# Altium PCB ctrb0505-A.PcbDoc (part 2 of 2)
Units mm, origin at the board's own origin, x right, y up, seen from the top; angles counter-clockwise.
Board outline 92.5 x 72 mm, 4 copper layers (Top Layer, Mid-Layer 1, Mid-Layer 2, Bottom Layer); 143 components, 70 nets, 526 pads, 81 vias.
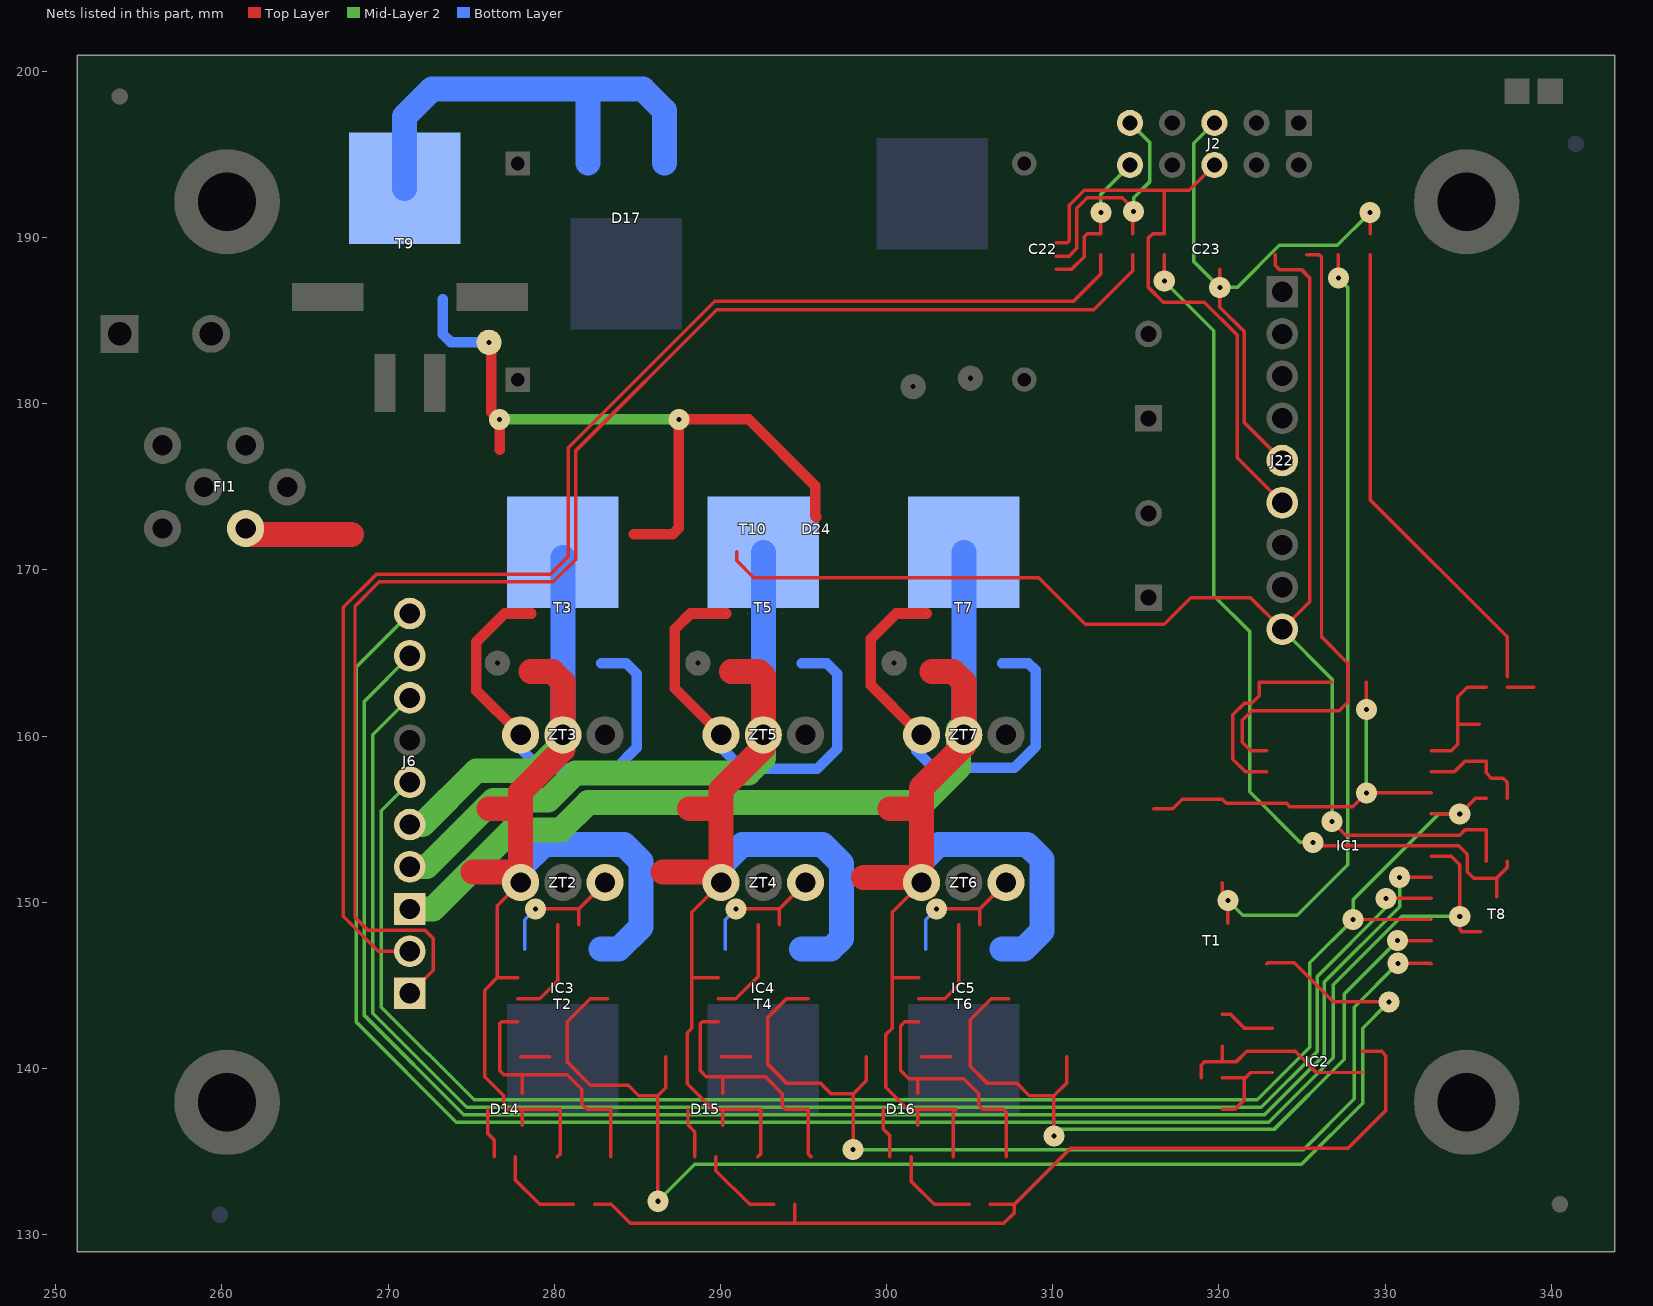
[diagram p4: the nets of this part, all layers, seen from the top]

## Via types
v1: diameter 1.27, hole 0.305, Top Layer to Bottom Layer, 81 vias

## Nets (pads, with @x,y where several pads share a name; then routed paths per layer and width w, separated by ;. In a path a pad name is that pad's centre, name@x,y a point inside that pad or via, vN(x,y) a via of type N, cw(c..) or ccw(c..) an arc to the next point about the centre after c; other vN are vias at no path point) (continued)
N7: C10.1 D8.K D11.A D14.1 D18.A D19.K IC3.6 J6.3 T2.S T3.D ZT2.S ZT3.D | length 83.4
  Top Layer w0.21: ZT2.S@277.976,151.184 276.579,149.787 276.579,145.469 ; D14.1@278.065,136.566 278.065,137.532 ; D11.A@280.186,134.674 280.364,134.852 C10.1@280.364,137.532 278.065,137.532 ; 276.579,145.469 IC3.6@277.816,145.469 276.579,145.469 ; 276.579,145.469 275.817,144.707 275.817,139.5 276.96,138.357 276.96,137.722 277.15,137.532 278.065,137.532
  Top Layer w1.5: D8.K@275.118,151.819 277.341,151.819 ZT2.S@277.976,151.184 277.976,155.629 ; D18.A@276.071,155.629 277.976,155.629 ; D19.K@278.611,163.884 279.881,163.884 280.516,163.249 ZT3.D@280.516,160.074 280.516,159.185 277.976,156.645 277.976,155.629
  Mid-Layer 2 w1.5: J6.3@271.308,154.677 272.07,154.677 275.309,157.915 278.865,157.915 280.516,159.566 ZT3.D@280.516,160.074
  Bottom Layer w1.5: ZT2.S@277.976,151.184 277.976,152.073 279.373,153.47 284.199,153.47 285.215,152.454 285.215,148.517 283.881,147.184 T2.S@282.816,147.184 ; ZT3.D@280.516,160.074 T3.D@280.516,170.742
N8: FI5.2 R8.2 T8.D | length 54.5
  Top Layer w0.21: v1(316.711,187.379) FI5.2@316.711,188.967 ; v1(325.664,153.597) 325.855,153.407 334.427,153.407 334.935,152.899 334.935,151.837 335.334,151.438 336.713,151.438 ; T8.D@336.713,150.32 336.713,151.438 ; R8.2@337.348,152.454 337.348,152.091 336.713,151.456 336.713,151.438
  Mid-Layer 2 w0.21: v1(316.711,187.379) 319.695,184.395 319.695,168.456 321.854,166.297 321.854,156.645 324.902,153.597 v1(325.664,153.597)
N9: D17.A1 D17.A2 T9.D | length 28.8
  Bottom Layer w1.5: T9.D@270.991,192.967 270.991,197.285 272.642,198.936 275.306,198.936 282.026,198.936 ; D17.A1@282.026,194.491 282.026,198.936 ; D17.A2@286.626,194.491 286.626,197.639 285.329,198.936 282.026,198.936
N10: C4.- D24.3 pad.VIA-091X03-VE@276.071,183.696 R3.2 R4.1 T9.G | length 43.9
  Top Layer w0.635: pad.VIA-091X03-VE@276.071,183.696 276.198,183.569 276.198,179.505 276.706,178.997 v1(276.706,179.061) R4.1@276.706,177.219 ; C4.-@284.783,172.139 287.12,172.139 287.501,172.52 R3.2@287.501,173.409 v1(287.501,179.061) 291.692,179.061 295.692,175.06 295.692,173.244 295.756,173.18
  Mid-Layer 2 w0.635: v1(276.706,179.061) v1(287.501,179.061)
  Bottom Layer w0.635: T9.G@273.291,186.3 273.291,184.19 273.785,183.696 pad.VIA-091X03-VE@276.071,183.696
N11: D2.K R11.1 | length 1.8
  Top Layer w0.21: R11.1@277.976,140.707 D2.K@279.733,140.707
N12: FI6.2 R7.2 R42.1 | length 30.4
  Top Layer w0.21: FI6.2@329.093,188.967 329.093,174.235 337.348,165.98 337.348,163.567 ; R42.1@337.348,162.932 R7.2@338.936,162.932
N13: C11.1 R6.1 | length 5.5
  Top Layer w0.21: C11.1@277.658,134.674 277.658,133.282 279.124,131.817 R6.1@281.151,131.817
N14: FI7.2 R2.2 T1.G | length 48.4
  Top Layer w0.21: 320.203,151.184 320.203,150.435 v1(320.534,150.105) T1.G@320.534,148.733 ; v1(327.188,187.57) FI7.2@327.188,188.967
  Mid-Layer 2 w0.21: v1(320.534,150.105) 321.423,149.216 324.712,149.216 327.76,152.264 327.76,186.998 v1(327.188,187.57)
N15: FI8.2 IC1.14 | length 38.2
  Top Layer w0.21: IC1.14@322.87,159.122 321.918,159.122 321.41,159.63 321.41,160.963 321.981,161.535 327.252,161.535 327.76,162.043 327.76,164.392 326.172,165.98 326.172,188.84 326.045,188.967 FI8.2@325.283,188.967
N16: D3.K R12.1 | length 1.8
  Top Layer w0.21: R12.1@290.041,140.707 D3.K@291.798,140.707
N17: C14.1 R9.1 | length 5.2
  Top Layer w0.21: C14.1@289.723,134.674 289.723,133.849 291.755,131.817 R9.1@293.216,131.817
N18: D4.K R13.1 | length 1.8
  Top Layer w0.21: R13.1@302.106,140.707 D4.K@303.863,140.707
N19: C17.1 R10.1 | length 5.5
  Top Layer w0.21: C17.1@301.471,134.674 301.471,133.214 302.868,131.817 R10.1@304.963,131.817
N26: IC5.7 R20.1 | length 6.3
  Top Layer w0.21: IC5.7@301.946,144.199 303.503,144.199 304.328,145.025 R20.1@304.328,148.644
N31: F1.1 FI1.CB | length 6.5
  Top Layer w1.5: FI1.CB@261.426,172.497 261.783,172.139 F1.1@267.803,172.139
N38: C16.1 D10.K D13.A D16.1 D22.A D23.K IC5.6 J6.1 T6.S T7.D ZT6.S ZT7.D | length 110.8
  Top Layer w0.21: D16.1@301.877,136.566 301.877,137.532 ; IC5.6@301.946,145.469 300.328,145.469 ; ZT6.S@302.106,151.184 300.328,149.406 300.328,145.469 ; D13.A@303.999,134.674 303.999,137.354 C16.1@304.176,137.532 301.877,137.532 ; 300.328,145.469 300.328,142.421 299.947,142.04 299.947,138.865 301.28,137.532 301.877,137.532
  Top Layer w1.5: D10.K@298.613,151.502 302.106,151.502 ZT6.S@302.106,151.184 302.106,155.629 ; D22.A@300.201,155.629 302.106,155.629 ; D23.K@302.741,163.884 304.011,163.884 304.646,163.249 ZT7.D@304.646,160.074 304.646,159.439 302.106,156.899 302.106,155.629
  Mid-Layer 2 w1.5: J6.1@271.308,149.597 272.705,149.597 277.468,154.359 280.389,154.359 282.04,156.01 302.233,156.01 304.328,158.106 ZT7.D@304.328,160.392
  Bottom Layer w1.5: ZT6.S@302.106,151.184 302.106,152.454 303.122,153.47 308.456,153.47 309.345,152.581 309.345,148.263 308.265,147.184 T6.S@306.946,147.184 ; ZT7.D@304.646,160.074 T7.D@304.646,171.06
N43: C13.1 D9.K D12.A D15.1 D20.A D21.K IC4.6 J6.2 T4.S T5.D ZT4.S ZT5.D | length 98
  Top Layer w0.21: IC4.6@289.881,145.469 288.263,145.469 288.263,145.342 ; ZT4.S@290.041,151.184 288.263,149.406 288.263,145.342 ; D15.1@290.13,136.566 290.13,137.532 ; D12.A@292.251,134.674 292.429,134.852 C13.1@292.429,137.532 290.13,137.532 ; 288.263,145.342 288.263,142.421 287.999,142.157 287.999,139.066 289.533,137.532 290.13,137.532
  Top Layer w1.5: D9.K@286.548,151.819 290.041,151.819 ZT4.S@290.041,151.184 290.041,155.629 ; D20.A@288.136,155.629 290.041,155.629 ; D21.K@290.676,163.884 292.327,163.884 292.581,163.63 ZT5.D@292.581,160.074 292.581,159.312 290.041,156.772 290.041,155.629
  Mid-Layer 2 w1.5: J6.2@271.308,152.137 272.324,152.137 276.325,156.137 279.627,156.137 281.278,157.788 291.692,157.788 292.581,158.677 ZT5.D@292.581,160.074
  Bottom Layer w1.5: ZT4.S@290.041,151.184 290.041,152.2 291.311,153.47 296.137,153.47 297.28,152.327 297.28,147.819 296.645,147.184 T4.S@294.881,147.184 ; ZT5.D@292.581,160.074 T5.D@292.581,171.06
N45: C16.2 D13.K D16.2 IC5.8 R13.2 | length 15.3
  Top Layer w0.21: D16.2@301.877,138.497 301.877,139.373 ; IC5.8@301.946,142.802 301.09,142.802 300.836,142.548 R13.2@300.836,140.707 300.836,139.881 301.344,139.373 301.877,139.373 ; D13.K@307.198,134.674 307.198,137.354 C16.2@307.021,137.532 305.789,137.532 305.535,137.786 305.535,138.484 304.646,139.373 301.877,139.373
N46: R31.2 T3.G ZT3.G | length 26.4
  Top Layer w0.635: ZT3.G@277.976,160.074 275.309,162.741 275.309,165.662 277.023,167.377 R31.2@278.611,167.377
  Bottom Layer w0.635: ZT3.G@277.976,160.074 277.976,159.249 279.182,158.042 283.691,158.042 284.961,159.312 284.961,163.757 284.326,164.392 T3.G@282.816,164.392
N47: R30.2 T7.G ZT7.G | length 26.8
  Top Layer w0.635: ZT7.G@301.788,160.392 301.725,160.392 299.058,163.059 299.058,165.853 300.582,167.377 R30.2@302.423,167.377
  Bottom Layer w0.635: ZT7.G@301.788,160.392 301.788,159.122 302.804,158.106 307.694,158.106 308.964,159.376 308.964,163.948 308.519,164.392 T7.G@306.946,164.392
N48: C17.2 D16.3 | length 3
  Top Layer w0.21: D16.3@299.795,137.532 299.795,136.35 300.201,135.944 C17.2@300.201,134.674
N49: C8.2 IC2.5 | length 3.4
  Top Layer w0.21: C8.2@320.203,143.247 320.711,143.247 321.537,142.421 IC2.5@323.219,142.421
N50: R33.2 T5.G ZT5.G | length 26.7
  Top Layer w0.635: ZT5.G@290.041,160.074 287.247,162.868 287.247,166.424 288.199,167.377 R33.2@290.358,167.377
  Bottom Layer w0.635: ZT5.G@290.041,160.074 290.041,159.312 291.311,158.042 295.819,158.042 297.026,159.249 297.026,163.757 296.391,164.392 T5.G@294.881,164.392
N51: C20.2 IC1.10 R41.2 | length 6.7
  Top Layer w0.21: IC1.10@332.776,157.852 334.173,157.852 334.808,158.487 C20.2@336.078,158.487 336.078,157.788 336.396,157.471 337.094,157.471 337.348,157.217 R41.2@337.348,156.264
N54: C18.1 IC1.11 R42.2 | length 7.9
  Top Layer w0.21: IC1.11@332.776,159.122 333.983,159.122 334.364,159.503 334.364,160.709 ; C18.1@335.663,160.709 334.364,160.709 ; R42.2@336.078,162.932 334.935,162.932 334.364,162.36 334.364,160.709
N56: C21.2 IC1.9 R38.1 | length 24.1
  Top Layer w0.21: R38.1@316.076,155.629 317.219,155.629 317.79,156.201 320.203,156.201 320.457,155.947 324.077,155.947 324.267,155.756 328.048,155.756 v1(328.874,156.582) IC1.9@332.776,156.582 ; v1(328.874,161.598) C21.2@328.874,163.249
  Mid-Layer 2 w0.21: v1(328.874,156.582) v1(328.874,161.598)
N57: C21.1 IC1.15 R39.1 | length 12.2
  Top Layer w0.21: IC1.15@322.87,157.852 321.6,157.852 320.838,158.614 320.838,161.281 321.537,161.979 321.981,161.979 322.426,162.424 R39.1@322.426,163.249 C21.1@326.773,163.249
N59: C13.2 D12.K D15.2 IC4.8 R12.2 | length 15.8
  Top Layer w0.21: IC4.8@289.881,142.802 288.898,142.802 288.771,142.675 R12.2@288.771,140.707 288.771,139.881 289.152,139.5 290.13,139.5 ; D15.2@290.13,138.497 290.13,139.5 ; D12.K@295.451,134.674 295.273,134.852 C13.2@295.273,137.532 293.914,137.532 293.724,137.722 293.724,138.484 292.708,139.5 290.13,139.5
N63: R20.2 T6.G ZT6.G | length 8.5
  Top Layer w0.21: v1(302.995,149.597) 305.598,149.597 ; R20.2@305.598,148.644 305.598,149.597 ; ZT6.G@307.186,151.184 305.598,149.597
  Bottom Layer w0.21: T6.G@302.346,147.184 302.346,148.947 v1(302.995,149.597)
N64: C14.2 D15.3 | length 3
  Top Layer w0.21: D15.3@288.047,137.532 288.047,136.604 288.453,136.198 C14.2@288.453,134.674
N65: R32.2 T4.G ZT4.G | length 8.5
  Top Layer w0.21: v1(290.93,149.597) 293.533,149.597 ; R32.2@293.533,148.644 293.533,149.597 ; ZT4.G@295.121,151.184 293.533,149.597
  Bottom Layer w0.21: T4.G@290.281,147.184 290.281,148.947 v1(290.93,149.597)
N66: IC4.7 R32.1 | length 6
  Top Layer w0.21: IC4.7@289.881,144.199 290.93,144.199 292.263,145.533 R32.1@292.263,148.644
N68: C10.2 D11.K D14.2 IC3.8 R11.2 | length 16.1
  Top Layer w0.21: IC3.8@277.816,142.802 276.833,142.802 276.706,142.675 R11.2@276.706,140.707 276.706,139.881 276.96,139.627 278.103,139.627 280.77,139.627 281.659,138.738 281.659,137.849 281.976,137.532 C10.2@283.208,137.532 283.386,137.532 D11.K@283.386,134.674 ; D14.2@278.065,138.497 278.065,139.627
N69: C11.2 D14.3 | length 3
  Top Layer w0.21: D14.3@275.982,137.532 275.982,136.096 276.388,135.69 C11.2@276.388,134.674
N70: R35.2 T2.G ZT2.G | length 8.5
  Top Layer w0.21: v1(278.865,149.597) 281.468,149.597 ; R35.2@281.468,148.644 281.468,149.597 ; ZT2.G@283.056,151.184 281.468,149.597
  Bottom Layer w0.21: T2.G@278.216,147.184 278.216,148.947 v1(278.865,149.597)
N71: IC3.7 R35.1 | length 6.2
  Top Layer w0.21: IC3.7@277.816,144.199 279.119,144.199 280.198,145.279 R35.1@280.198,148.644
N76: C7.2 IC2.2 IC2.6 R37.1 | length 12.3
  Top Layer w0.21: R37.1@318.933,139.437 318.933,140.199 319.124,140.389 320.203,140.389 ; C7.2@320.203,141.342 320.203,140.389 ; IC2.2@328.618,139.754 325.855,139.754 324.585,141.024 IC2.6@323.219,141.024 321.664,141.024 321.029,140.389 320.203,140.389
N78: IC2.7 R37.2 R50.1 | length 6.1
  Top Layer w0.21: R50.1@320.203,137.532 320.965,137.532 321.537,138.103 321.537,139.373 321.6,139.437 ; R37.2@320.203,139.437 321.6,139.437 ; IC2.7@323.219,139.754 321.918,139.754 321.6,139.437
OE: FI9.2 IC1.7 J22.9 R5.2 R8.1 T10.G | length 85.7
  Top Layer w0.21: 290.981,171.098 290.981,170.564 292.009,169.536 309.154,169.536 311.948,166.742 316.711,166.742 318.298,168.329 321.901,168.329 J22.9@323.806,166.424 325.474,168.092 325.474,187.57 324.966,188.078 323.632,188.078 323.378,188.332 FI9.2@323.378,188.967 ; v1(326.807,154.867) 327.633,154.042 IC1.7@332.776,154.042 334.491,154.042 334.808,154.359 R5.2@336.078,154.359 R8.1@336.078,152.454
  Mid-Layer 2 w0.21: J22.9@323.806,166.424 326.807,163.423 v1(326.807,154.867)
OSC: IC2.3 R6.2 R9.2 R10.2 | length 60.3
  Top Layer w0.21: R6.2@282.421,131.817 283.437,131.817 284.58,130.674 296.137,130.674 ; R9.2@294.486,131.817 294.486,130.674 296.137,130.674 ; R10.2@306.233,131.817 307.694,131.817 ; IC2.3@328.618,141.024 329.792,141.024 330.046,140.77 330.046,137.468 327.76,135.182 311.059,135.182 307.694,131.817 ; 296.137,130.674 307.059,130.674 307.694,131.309 307.694,131.817
SENSOR1: IC1.4 J6.6 | length 94.1
  Top Layer w0.21: v1(330.046,150.232) IC1.4@332.776,150.232
  Mid-Layer 2 w0.21: J6.6@271.308,162.297 269.086,160.074 269.086,143.31 274.737,137.659 322.553,137.659 325.904,141.01 325.904,145.518 330.046,149.66 v1(330.046,150.232)
SENSOR2: IC1.5 J6.7 | length 99
  Top Layer w0.21: v1(330.871,151.502) IC1.5@332.776,151.502
  Mid-Layer 2 w0.21: J6.7@271.308,164.837 268.578,162.106 268.578,143.183 274.547,137.214 322.743,137.214 326.324,140.795 326.324,145.176 330.871,149.724 v1(330.871,151.502)
SENSOR3: IC1.6 J6.8 T8.G | length 109.7
  Top Layer w0.21: IC1.6@332.776,152.772 333.983,152.772 334.491,152.264 v1(334.491,149.152) 334.491,148.365 334.618,148.238 T8.G@335.748,148.238
  Mid-Layer 2 w0.21: J6.8@271.308,167.377 268.07,164.138 268.07,142.802 274.102,136.77 322.997,136.77 326.871,140.643 326.871,145.025 330.998,149.152 v1(334.491,149.152)
SPEED-MEASURE: C22.3 FI5.1 J2.6 J22.6 | length 37.1
  Top Layer w0.21: C22.3@310.209,189.684 310.869,189.684 310.996,189.811 310.996,191.951 311.885,192.84 316.711,192.84 ; J2.6@319.726,194.364 318.202,192.84 316.711,192.84 ; J22.6@323.806,174.044 321.092,176.758 321.092,184.14 319.124,186.109 316.647,186.109 315.758,186.998 315.758,189.983 316.012,190.237 FI5.1@316.711,190.237 316.711,192.84
SPEED-SETPOINT: C23.5 FI6.1 J2.5 J22.5 | length 36.3
  Top Layer w0.21: C23.5@320.051,188.084 v1(320.051,186.998) 320.051,185.817 321.537,184.331 321.537,178.853 J22.5@323.806,176.584 ; FI6.1@329.093,190.237 v1(329.093,191.507)
  Mid-Layer 2 w0.21: J2.5@319.726,196.904 318.489,195.667 318.489,188.56 v1(320.051,186.998) 321.092,186.998 323.632,189.538 327.125,189.538 v1(329.093,191.507)
TEMP+: FI3.2 J3.2 | length 82.4
  Top Layer w0.21: J3.2@271.308,147.057 269.403,147.057 267.308,149.152 267.308,167.758 269.276,169.726 279.754,169.726 280.833,170.806 280.833,177.346 289.66,186.173 311.25,186.173 312.901,187.824 FI3.2@312.901,188.967
TEMP-: FI4.2 J3.1 | length 87.8
  Top Layer w0.21: J3.1@271.308,144.517 272.705,145.914 272.705,147.819 272.197,148.327 268.768,148.327 268.006,149.089 268.006,167.821 269.467,169.282 279.944,169.282 281.278,170.615 281.278,177.156 289.787,185.665 312.456,185.665 314.806,188.014 FI4.2@314.806,188.967
TEMPMEASURE+: C22.1 FI3.1 J2.10 | length 9.1
  Top Layer w0.21: C22.1@310.209,188.084 311.129,188.084 311.885,188.84 311.885,190.046 312.075,190.237 FI3.1@312.901,190.237 v1(312.901,191.507)
  Mid-Layer 2 w0.21: v1(312.901,191.507) 312.901,192.619 J2.10@314.646,194.364
TEMPMEASURE-: C22.2 FI4.1 J2.9 | length 15.8
  Top Layer w0.21: C22.2@310.209,188.884 310.977,188.884 311.44,189.348 311.44,191.761 312.075,192.396 314.171,192.396 314.806,191.761 314.806,191.38 v1@314.806,191.507 ; FI4.1@314.806,190.237 v1@314.806,191.507 ; v1(314.869,191.57) v1@314.806,191.507
  Mid-Layer 2 w0.21: J2.9@314.646,196.904 315.822,195.728 315.822,193.348 314.869,192.396 v1(314.869,191.57)
TOP-DR-A: IC1.2 IC5.2 R60.1 | length 46.4
  Top Layer w0.21: IC5.2@307.346,144.199 306.297,144.199 305.027,142.929 305.027,140.135 306.043,139.119 307.821,139.119 308.583,138.357 310.069,138.357 ; v1(310.069,135.944) 310.069,138.357 ; R60.1@310.831,140.707 310.831,139.119 310.069,138.357 ; v1(330.744,147.692) IC1.2@332.776,147.692
  Mid-Layer 2 w0.21: v1(310.069,135.944) 310.45,136.325 323.315,136.325 327.531,140.541 327.531,144.478 v1(330.744,147.692)
TOP-DR-B: IC1.1 IC4.2 R59.1 | length 60.2
  Top Layer w0.21: IC4.2@295.281,144.199 293.978,144.199 292.835,143.056 292.835,140.262 293.978,139.119 296.01,139.119 296.668,138.461 297.981,138.461 ; v1(297.981,135.119) 297.981,138.461 ; R59.1@298.766,140.707 298.766,139.246 297.981,138.461 ; v1(330.776,146.326) 332.745,146.326 IC1.1@332.776,146.295
  Mid-Layer 2 w0.21: v1(297.981,135.119) 325.093,135.119 328.141,138.167 328.141,143.691 v1(330.776,146.326)
TOP-DR-C: IC1.24 IC3.2 R58.1 | length 80.6
  Top Layer w0.21: IC3.2@283.216,144.199 282.167,144.199 280.77,142.802 280.77,140.389 282.167,138.992 284.453,138.992 285.088,138.357 286.231,138.357 ; v1(286.231,132.007) 286.231,138.357 ; R58.1@286.701,140.707 286.701,138.827 286.231,138.357 ; IC1.24@322.87,146.295 322.934,146.358 324.521,146.358 326.871,144.009 v1(330.236,144.009)
  Mid-Layer 2 w0.21: v1(286.231,132.007) 288.453,134.23 324.966,134.23 328.649,137.913 328.649,142.421 v1(330.236,144.009)
V-REF-M: IC1.3 IC1.8 J6.4 R41.1 | length 100.7
  Top Layer w0.21: v1(328.077,148.962) IC1.3@332.776,148.962 ; IC1.8@332.776,155.312 v1(334.491,155.312) 335.443,156.264 R41.1@336.078,156.264
  Mid-Layer 2 w0.21: J6.4@271.308,157.217 269.594,155.502 269.594,143.691 275.182,138.103 322.299,138.103 325.474,141.278 325.474,146.358 v1(328.077,148.962) 328.077,150.168 333.221,155.312 v1(334.491,155.312)
pads on no net: C22.4 D24.2 IC3.4 IC3.5 IC4.4 IC4.5 IC5.4 IC5.5 J1.3 J1.4 J2.7 J2.8 J22.7 J22.8 MIR1.1 MIR2.1 MIR3.1 MIR4.1 PT1.2
copper on no net: | length 84
  Top Layer w0.1: 314.806,130.059 317.806,130.059 ; 314.806,130.059 314.806,133.059 ; 314.806,130.059 311.806,130.059 311.806,133.059 314.806,133.059 ; 314.806,130.059 314.806,133.059 ; 314.806,133.059 317.806,133.059 ; 317.806,130.059 317.806,133.059 ; 317.806,130.059 320.806,130.059 ; 317.806,130.059 317.806,133.059 ; 317.806,133.059 320.806,133.059 ; 320.806,130.059 320.806,133.059 ; 320.806,130.059 323.806,130.059 323.806,133.059 320.806,133.059 ; 320.806,130.059 320.806,133.059
  Mid-Layer 1 w0.1: 314.806,130.059 317.806,130.059 317.806,133.059 314.806,133.059 314.806,130.059
  Mid-Layer 2 w0.1: 317.806,130.059 320.806,130.059 320.806,133.059 317.806,133.059 317.806,130.059
  Bottom Layer w0.1: 320.806,130.059 323.806,130.059 323.806,133.059 320.806,133.059 320.806,130.059

## Polygon pours and split planes (outlines as drawn)
GND on Top Layer "Top Layer-GND" (solid, pour order 1): 252.411,129.959 cw(c252.411,130.064) 252.306,130.064 252.306,182.766 cw(c252.411,182.766) 252.485,182.841 ccw(c252.703,183.061) 252.703,182.751 254.989,182.751 ccw(c254.989,183.061) 255.299,183.061 255.299,185.347 ccw(c254.989,185.347) 254.989,185.657 252.703,185.657 ccw(c252.703,185.347) 252.485,185.567 cw(c252.411,185.642) 252.306,185.642 252.306,197.481 cw(c252.411,197.481) 252.497,197.542 ccw(c253.846,198.492) 254.886,199.773 cw(c254.952,199.854) 254.952,199.959 336.87,199.959 cw(c336.87,199.854) 336.947,199.782 ccw(c337.174,199.571) 336.864,199.571 336.864,198.047 ccw(c337.174,198.047) 337.174,197.737 338.698,197.737 ccw(c338.698,198.047) 338.876,197.793 cw(c338.936,197.707) 338.996,197.793 ccw(c339.174,198.047) 339.174,197.737 340.698,197.737 ccw(c340.698,198.047) 341.008,198.047 341.008,199.571 ccw(c340.698,199.571) 340.925,199.782 cw(c341.002,199.854) 341.002,199.959 342.701,199.959 cw(c342.701,199.854) 342.806,199.854 342.806,130.064 cw(c342.701,130.064) 342.701,129.959 340.618,129.959 cw(c340.618,130.064) 340.523,130.017 cw(c340.429,130.064) 340.429,129.959 329.513,129.959 cw(c329.513,130.064) 329.433,130.132 ccw(c328.95,130.544) 329.515,130.835 cw(c329.608,130.884) 329.522,130.944 ccw(c329.032,131.294) 329.488,131.688 cw(c329.567,131.757) 329.467,131.789 ccw(c328.912,131.966) 329.322,132.381 cw(c329.396,132.455) 329.361,132.554 ccw(c329.169,133.105) 329.08,133.681 cw(c329.064,133.785) 329.079,133.681 328.377,133.582 cw(c328.362,133.686) 328.258,133.702 ccw(c327.487,133.815) 328.259,133.921 ccw(c327.952,133.879) 328.25,133.967 ccw(c327.73,133.813) 327.735,134.355 ccw(c327.732,134.045) 327.689,134.352 326.144,134.135 ccw(c326.188,133.828) 326.144,134.135 ccw(c326.361,132.592) 324.813,132.767 cw(c324.709,132.779) 324.724,132.675 324.58,132.655 ccw(c324.624,132.348) 324.36,132.512 cw(c324.271,132.567) 324.166,132.567 324.166,133.059 ccw(c323.806,133.059) 323.806,133.419 311.806,133.419 ccw(c311.806,133.059) 311.446,133.059 311.446,130.064 cw(c311.341,130.064) 311.341,129.959
GND on Top Layer "Top Layer-GND 1" (solid, pour order 0): 314.806,161.959 317.306,161.959 317.306,156.959 314.806,156.959
GND on Mid-Layer 1 "Mid-Layer 1-GND" (solid, pour order 2): 252.411,129.959 cw(c252.411,130.064) 252.306,130.064 252.306,199.854 cw(c252.411,199.854) 252.411,199.959 342.701,199.959 cw(c342.701,199.854) 342.806,199.854 342.806,130.064 cw(c342.701,130.064) 342.701,129.959 323.911,129.959 cw(c323.911,130.064) 323.806,130.064 323.806,133.259 318.157,133.259 cw(c318.157,133.364) 318.078,133.295 ccw(c317.806,133.059) 317.806,133.419 314.806,133.419 ccw(c314.806,133.059) 314.534,133.295 cw(c314.455,133.364) 314.455,133.259 311.806,133.259 311.806,130.064 cw(c311.701,130.064) 311.701,129.959
GND-PUIS on Mid-Layer 2 "Mid-Layer 2-GND-PUIS" (solid, pour order 3): 252.411,129.959 cw(c252.411,130.064) 252.306,130.064 252.306,183.597 cw(c252.411,183.597) 252.508,183.638 ccw(c253.846,184.204) 252.759,183.239 cw(c252.681,183.17) 252.786,183.17 252.786,180.077 ccw(c253.846,180.076) 253.096,179.327 254.972,177.451 cw(c254.898,177.377) 255.003,177.385 ccw(c256.426,177.497) 256.537,178.92 cw(c256.546,179.024) 256.471,178.95 254.937,180.485 cw(c255.011,180.559) 254.906,180.559 254.906,183.17 cw(c255.011,183.17) 254.933,183.239 ccw(c253.846,184.204) 252.508,184.77 cw(c252.411,184.811) 252.306,184.811 252.306,199.854 cw(c252.411,199.854) 252.411,199.959 342.701,199.959 cw(c342.701,199.854) 342.806,199.854 342.806,130.064 cw(c342.701,130.064) 342.701,129.959 323.911,129.959 cw(c323.911,130.064) 323.806,130.064 323.806,133.259 321.157,133.259 cw(c321.157,133.364) 321.078,133.295 ccw(c320.806,133.059) 320.806,133.419 317.806,133.419 ccw(c317.806,133.059) 317.534,133.295 cw(c317.455,133.364) 317.455,133.259 311.806,133.259 311.806,130.064 cw(c311.701,130.064) 311.701,129.959
GND on Bottom Layer "Bottom Layer-GND" (solid, pour order 10): 294.306,182.459 294.306,199.959 321.806,199.959 321.806,197.9 ccw(c322.266,196.904) 321.806,195.908 321.806,195.36 ccw(c322.266,194.364) 321.806,193.368 321.806,190.925 ccw(c321.283,190.363) 321.079,189.624 ccw(c321.283,188.884) 321.806,188.323 321.806,182.459 308.595,182.459 ccw(c308.286,181.459) 307.977,182.459 306.101,182.459 306.101,184.247 ccw(c305.828,184.395) 306.138,184.395 306.138,187.57 ccw(c305.828,187.57) 305.828,187.88 304.254,187.88 ccw(c304.254,187.57) 303.944,187.57 303.944,184.395 ccw(c304.254,184.395) 303.981,184.247 303.981,182.459 301.667,182.459 301.501,182.625 301.501,184.247 ccw(c301.228,184.395) 301.538,184.395 301.538,187.57 ccw(c301.228,187.57) 301.228,187.88 299.654,187.88 ccw(c299.654,187.57) 299.344,187.57 299.344,184.395 ccw(c299.654,184.395) 299.381,184.247 299.381,182.459
+24V on Bottom Layer "Bottom Layer-+24V" (solid, pour order 9): 264.306,129.959 264.306,141.959 252.306,141.959 252.306,154.959 270.078,154.959 ccw(c271.308,154.677) 272.539,154.959 311.279,154.959 ccw(c311.504,155.693) 311.729,154.959 318.189,154.959 ccw(c318.87,155.312) 319.551,154.959 321.806,154.959 321.806,133.531 311.306,133.531 311.306,129.959
+24V on Bottom Layer "Bottom Layer-+24V 1" (solid, pour order 8): 276.306,182.459 276.306,182.966 ccw(c276.071,183.696) 276.306,184.426 276.306,197.876 280.966,197.876 280.966,196.226 ccw(c281.239,196.079) 280.929,196.079 280.929,192.904 ccw(c281.239,192.904) 281.239,192.593 282.813,192.593 ccw(c282.813,192.904) 283.123,192.904 283.123,196.079 ccw(c282.813,196.079) 283.086,196.226 283.086,197.876 284.89,197.876 285.566,197.2 285.566,196.226 ccw(c285.839,196.079) 285.529,196.079 285.529,192.904 ccw(c285.839,192.904) 285.839,192.593 287.413,192.593 ccw(c287.413,192.904) 287.723,192.904 287.723,196.079 ccw(c287.413,196.079) 287.686,196.226 287.686,197.639 ccw(c286.626,197.639) 287.376,198.389 286.079,199.686 ccw(c285.329,198.936) 285.607,199.959 293.806,199.959 293.806,182.459
N9 on Bottom Layer "Bottom Layer-N9" (solid, pour order 7): 252.306,182.459 252.306,199.959 275.306,199.959 275.306,184.324 274.045,184.324 273.967,184.402 274.078,184.402 ccw(c274.078,184.712) 274.388,184.712 274.388,187.887 ccw(c274.078,187.887) 274.078,188.197 272.504,188.197 ccw(c272.504,187.887) 272.194,187.887 272.194,184.712 ccw(c272.504,184.712) 272.504,184.402 272.663,184.402 272.663,184.19 ccw(c273.291,184.19) 272.847,183.746 273.341,183.252 ccw(c273.785,183.696) 273.785,183.068 275.306,183.068 275.306,182.459 268.848,182.459 ccw(c268.451,183.442) 269.063,182.576 ccw(c268.691,183.569) 269.751,183.569 269.751,184.564 ccw(c269.478,184.712) 269.788,184.712 269.788,187.887 ccw(c269.478,187.887) 269.478,188.197 267.904,188.197 ccw(c267.904,187.887) 267.594,187.887 267.594,184.712 ccw(c267.904,184.712) 267.631,184.564 267.631,184.114 ccw(c268.451,183.442) 268.054,182.459
N7 on Bottom Layer "Bottom Layer-N7" (solid, pour order 6): 264.306,170.459 264.306,173.62 ccw(c263.926,174.996) 264.306,176.373 264.306,181.459 276.746,181.459 ccw(c277.806,181.459) 276.759,181.291 276.759,180.722 ccw(c277.069,180.722) 277.069,180.412 277.638,180.412 ccw(c277.806,181.459) 277.974,180.412 278.543,180.412 ccw(c278.543,180.722) 278.853,180.722 278.853,180.964 cw(c279.478,180.709) 279.47,181.384 285.306,181.448 285.306,164.299 284.77,164.836 ccw(c284.326,164.392) 284.326,165.02 283.913,165.02 283.913,165.98 ccw(c283.603,165.98) 283.603,166.29 282.029,166.29 ccw(c282.029,165.98) 281.719,165.98 281.719,162.805 ccw(c282.029,162.805) 282.029,162.494 283.603,162.494 ccw(c283.603,162.805) 283.913,162.805 283.913,163.764 284.066,163.764 284.333,163.497 284.333,160.711 ccw(c283.056,160.074) 282.8,158.67 279.442,158.67 279.016,159.096 ccw(c277.976,160.074) 277.654,158.683 278.739,157.598 ccw(c279.182,158.042) 279.182,157.414 283.691,157.414 ccw(c283.691,158.042) 284.135,157.598 285.306,158.77 285.306,155.959 271.421,155.959 ccw(c271.308,157.217) 271.196,155.959 252.306,155.959 252.306,170.459
N43 on Bottom Layer "Bottom Layer-N43" (solid, pour order 5): 285.906,155.959 cw(c285.906,156.059) 285.806,156.059 285.806,181.359 cw(c285.906,181.359) 285.906,181.459 299.698,181.459 cw(c299.698,181.359) 299.769,181.43 300.277,180.922 cw(c300.206,180.851) 300.306,180.851 300.306,165.474 cw(c300.206,165.474) 300.228,165.376 ccw(c300.455,164.392) 300.228,163.408 cw(c300.206,163.31) 300.306,163.31 300.306,156.059 cw(c300.206,156.059) 300.206,155.959
N38 on Bottom Layer "Bottom Layer-N38" (solid, pour order 4): 300.906,155.959 cw(c300.906,156.059) 300.806,156.059 300.806,159.212 cw(c300.906,159.212) 300.987,159.27 ccw(c302.106,160.074) 301.195,159.04 cw(c301.129,158.965) 301.227,158.988 ccw(c301.789,159.122) 301.38,158.713 cw(c301.309,158.642) 301.381,158.712 302.396,157.697 ccw(c302.804,158.106) 302.804,157.528 307.694,157.528 ccw(c307.694,158.106) 308.102,157.697 309.372,158.966 cw(c309.443,158.896) 309.372,158.967 ccw(c308.964,159.376) 309.542,159.376 309.542,163.948 ccw(c308.964,163.948) 309.372,164.356 cw(c309.443,164.427) 309.372,164.357 308.928,164.8 ccw(c308.52,164.392) 308.519,164.97 308.093,164.97 cw(c308.093,165.07) 307.993,165.07 307.993,165.98 ccw(c307.733,165.98) 307.733,166.24 306.159,166.24 ccw(c306.159,165.98) 305.899,165.98 305.899,162.805 ccw(c306.159,162.805) 306.159,162.544 307.733,162.544 ccw(c307.733,162.805) 307.993,162.805 307.993,163.714 cw(c308.093,163.714) 308.093,163.814 308.239,163.814 cw(c308.239,163.714) 308.31,163.785 308.357,163.738 cw(c308.286,163.667) 308.386,163.667 308.386,161.06 cw(c308.286,161.06) 308.212,160.993 ccw(c307.186,160.074) 306.516,158.87 cw(c306.467,158.783) 306.467,158.683 303.085,158.683 cw(c303.085,158.783) 303.014,158.712 302.913,158.814 cw(c302.983,158.885) 302.924,158.965 ccw(c302.106,160.074) 300.987,160.878 cw(c300.906,160.936) 300.806,160.936 300.806,163.282 cw(c300.906,163.282) 300.906,163.382 301.199,163.382 cw(c301.199,163.282) 301.299,163.282 301.299,162.805 ccw(c301.559,162.805) 301.559,162.544 303.133,162.544 ccw(c303.133,162.805) 303.393,162.805 303.393,165.98 ccw(c303.133,165.98) 303.133,166.24 301.559,166.24 ccw(c301.559,165.98) 301.299,165.98 301.299,165.502 cw(c301.199,165.502) 301.199,165.402 300.906,165.402 cw(c300.906,165.502) 300.806,165.502 300.806,180.161 cw(c300.906,180.161) 300.968,180.239 ccw(c301.598,181.029) 302.562,181.329 cw(c302.658,181.359) 302.658,181.459 303.945,181.459 cw(c303.945,181.359) 304.044,181.375 ccw(c305.041,181.537) 306.038,181.375 cw(c306.137,181.359) 306.137,181.459 307.194,181.459 cw(c307.194,181.359) 307.294,181.368 ccw(c308.286,181.459) 309.278,181.368 cw(c309.378,181.359) 309.378,181.459 321.706,181.459 cw(c321.706,181.359) 321.806,181.359 321.806,156.059 cw(c321.706,156.059) 321.706,155.959 319.2,155.959 cw(c319.2,156.059) 319.16,155.968 ccw(c318.87,155.311) 318.58,155.968 cw(c318.54,156.059) 318.54,155.959 312.234,155.959 cw(c312.234,156.059) 312.145,156.014 ccw(c311.504,155.693) 310.863,156.014 cw(c310.774,156.059) 310.774,155.959

## Keep-outs
BOARD_FIGURE:
  the board outline again, w0

## Other copper
Top Layer:
  text "1" at 312.506,129.859 h2.5
Mid-Layer 1:
  text "2" at 315.506,129.859 h2.5
Mid-Layer 2:
  text "3" at 318.825,129.833 h2.5
Bottom Layer:
  text "4" at 321.824,129.759 h2.5

## Silkscreen, mask and mechanical layers (free items; w line width, h text height)
Symbol-A:
  lines w0.18: 256.386,174.044 256.386,175.949 ; 262.728,178.792 ccw(c261.466,174.997) 261.466,178.997 ccw(c261.466,174.997) 265.34,174 ; 262.998,178.691 cw(c261.466,174.996) 265.413,174.346
  text "CDE TURBINE RB0505" at 255.751,198.794 h1.4
  text "10096505" at 255.74,197.19 h1.4
  text "-" at 268.806,191.687 h1.5
  text "+" at 272.306,191.604 h1.5
  text "-" at 253.306,187.187 h1.5
  text "+" at 258.806,187.104 h1.5
  text "GND" at 339.571,185.781 h1.4
  text "EN" at 339.571,183.569 h1.4
  text "FAULT/" at 337.983,181.018 h1.4
  text "L1" at 262.736,178.807 h1.2
  text "BRAKE/" at 337.983,178.478 h1.4
  text "SPD-SET" at 337.348,175.938 h1.4
  text "J4" at 253.528,174.161 h1.2
  text "SPD-MEA" at 337.348,173.398 h1.4
  text "NC" at 339.571,170.858 h1.4
  text "NC" at 339.571,168.318 h1.4
  text "SENS3" at 252.258,166.409 h1.4
  text "IDENT" at 338.301,165.789 h1.4
  text "SENS2" at 252.258,163.873 h1.4
  text "SENS1" at 252.258,161.333 h1.4
  text "GND" at 252.893,158.793 h1.4
  text "SUPPLY" at 251.623,156.253 h1.4
  text "PH3" at 252.893,153.709 h1.4
  text "PH2" at 252.893,151.502 h1.4
  text "PH1" at 252.893,148.962 h1.4
  text "10096505" at 293.216,85.123 h2
Symbol-B:
  text "10096505" at 281.866,84.806 h2
Resist-A:
  dashed: 343.806,128.959 330.806,128.959 330.806,142.959 343.806,142.959
  dashed: 273.306,129.459 251.306,129.459 251.306,142.959 273.306,142.959
  dashed: 260.894,195.874 261.468,195.736 262.014,195.511 262.517,195.202 262.966,194.819 263.349,194.37 263.658,193.867 263.883,193.321 264.021,192.747 264.068,192.159 264.021,191.571 263.883,190.997 263.658,190.451 263.349,189.948 262.966,189.499 262.517,189.116 262.014,188.807 261.468,188.582 260.894,188.444 260.306,188.397 259.718,188.444 259.144,188.582 258.598,188.807 258.095,189.116 257.646,189.499 257.263,189.948 256.954,190.451 256.729,190.997 256.591,191.571 256.544,192.159 256.591,192.747 256.729,193.321 256.954,193.867 257.263,194.37 257.646,194.819 258.095,195.202 258.598,195.511 259.144,195.736 259.718,195.874 260.306,195.921
  dashed: 335.494,195.874 336.068,195.736 336.614,195.511 337.117,195.202 337.566,194.819 337.949,194.37 338.258,193.867 338.483,193.321 338.621,192.747 338.668,192.159 338.621,191.571 338.483,190.997 338.258,190.451 337.949,189.948 337.566,189.499 337.117,189.116 336.614,188.807 336.068,188.582 335.494,188.444 334.906,188.397 334.318,188.444 333.744,188.582 333.198,188.807 332.695,189.116 332.246,189.499 331.863,189.948 331.554,190.451 331.329,190.997 331.191,191.571 331.144,192.159 331.191,192.747 331.329,193.321 331.554,193.867 331.863,194.37 332.246,194.819 332.695,195.202 333.198,195.511 333.744,195.736 334.318,195.874 334.906,195.921
  lines w1: 251.306,128.959 343.806,128.959 343.806,200.959 251.306,200.959 251.306,128.959
Resist-B:
  drawing of 8 lines, arcs and shapes, not listed
Symbol-A-1:
  circle w0.1: c261.466,174.997 r4
  dashed: 305.219,181.968 305.371,181.867 305.472,181.715 305.507,181.537 305.472,181.359 305.371,181.207 305.219,181.106 305.041,181.071 304.863,181.106 304.711,181.207 304.61,181.359 304.575,181.537 304.61,181.715 304.711,181.867 304.863,181.968 305.041,182.003
  dashed: 301.776,181.46 301.928,181.359 302.029,181.207 302.064,181.029 302.029,180.851 301.928,180.699 301.776,180.598 301.598,180.563 301.42,180.598 301.268,180.699 301.167,180.851 301.132,181.029 301.167,181.207 301.268,181.359 301.42,181.46 301.598,181.495
  dashed: 300.633,164.823 300.785,164.722 300.886,164.57 300.921,164.392 300.886,164.214 300.785,164.062 300.633,163.961 300.455,163.926 300.277,163.961 300.125,164.062 300.024,164.214 299.989,164.392 300.024,164.57 300.125,164.722 300.277,164.823 300.455,164.858
  dashed: 288.822,164.823 288.974,164.722 289.075,164.57 289.11,164.392 289.075,164.214 288.974,164.062 288.822,163.961 288.644,163.926 288.466,163.961 288.314,164.062 288.213,164.214 288.178,164.392 288.213,164.57 288.314,164.722 288.466,164.823 288.644,164.858
  dashed: 276.757,164.823 276.909,164.722 277.01,164.57 277.045,164.392 277.01,164.214 276.909,164.062 276.757,163.961 276.579,163.926 276.401,163.961 276.249,164.062 276.148,164.214 276.113,164.392 276.148,164.57 276.249,164.722 276.401,164.823 276.579,164.858
  dashed: 276.249,184.127 276.401,184.026 276.502,183.874 276.537,183.696 276.502,183.518 276.401,183.366 276.249,183.265 276.071,183.23 275.893,183.265 275.741,183.366 275.64,183.518 275.605,183.696 275.64,183.874 275.741,184.026 275.893,184.127 276.071,184.162
  lines w0.1: 256.068,172.457 ccw(c256.386,172.457) 256.703,172.457 256.703,177.537 ccw(c256.386,177.537) 256.068,177.537 256.068,172.457
  text "L1" at 260.831,174.679 h1
  text "J4" at 254.163,174.512 h1
Symbol-B-1:
  dashed: 305.219,181.968 305.371,181.867 305.472,181.715 305.507,181.537 305.472,181.359 305.371,181.207 305.219,181.106 305.041,181.071 304.863,181.106 304.711,181.207 304.61,181.359 304.575,181.537 304.61,181.715 304.711,181.867 304.863,181.968 305.041,182.003
  dashed: 301.776,181.46 301.928,181.359 302.029,181.207 302.064,181.029 302.029,180.851 301.928,180.699 301.776,180.598 301.598,180.563 301.42,180.598 301.268,180.699 301.167,180.851 301.132,181.029 301.167,181.207 301.268,181.359 301.42,181.46 301.598,181.495
  dashed: 300.633,164.823 300.785,164.722 300.886,164.57 300.921,164.392 300.886,164.214 300.785,164.062 300.633,163.961 300.455,163.926 300.277,163.961 300.125,164.062 300.024,164.214 299.989,164.392 300.024,164.57 300.125,164.722 300.277,164.823 300.455,164.858
  dashed: 288.822,164.823 288.974,164.722 289.075,164.57 289.11,164.392 289.075,164.214 288.974,164.062 288.822,163.961 288.644,163.926 288.466,163.961 288.314,164.062 288.213,164.214 288.178,164.392 288.213,164.57 288.314,164.722 288.466,164.823 288.644,164.858
  dashed: 276.757,164.823 276.909,164.722 277.01,164.57 277.045,164.392 277.01,164.214 276.909,164.062 276.757,163.961 276.579,163.926 276.401,163.961 276.249,164.062 276.148,164.214 276.113,164.392 276.148,164.57 276.249,164.722 276.401,164.823 276.579,164.858
  dashed: 276.249,184.127 276.401,184.026 276.502,183.874 276.537,183.696 276.502,183.518 276.401,183.366 276.249,183.265 276.071,183.23 275.893,183.265 275.741,183.366 275.64,183.518 275.605,183.696 275.64,183.874 275.741,184.026 275.893,184.127 276.071,184.162
  lines w0.1: 357.986,159.959 359.891,159.959 359.891,165.154 ; 360.806,159.959 366.806,159.959 ; 362.306,180.959 366.806,180.959 ; 364.806,161.459 365.306,159.959 ; 364.806,179.459 365.306,180.959 ; 365.806,161.459 365.306,159.959 ; 365.806,179.459 365.306,180.959 ; 362.431,174.679 361.161,174.679 361.161,180.959 362.431,180.959 362.431,174.679 ; 362.431,174.679 357.986,174.679 357.986,165.154 362.431,165.154 362.431,174.679 ; 365.306,159.959 365.306,180.959 ; 356.716,128.959 357.986,128.959 357.986,200.959 356.716,200.959 356.716,128.959
  text "21" at 366.241,170.582 h2 r270
HeightLimit-A:
  dashed: 305.219,181.968 305.371,181.867 305.472,181.715 305.507,181.537 305.472,181.359 305.371,181.207 305.219,181.106 305.041,181.071 304.863,181.106 304.711,181.207 304.61,181.359 304.575,181.537 304.61,181.715 304.711,181.867 304.863,181.968 305.041,182.003
  dashed: 301.776,181.46 301.928,181.359 302.029,181.207 302.064,181.029 302.029,180.851 301.928,180.699 301.776,180.598 301.598,180.563 301.42,180.598 301.268,180.699 301.167,180.851 301.132,181.029 301.167,181.207 301.268,181.359 301.42,181.46 301.598,181.495
  dashed: 300.633,164.823 300.785,164.722 300.886,164.57 300.921,164.392 300.886,164.214 300.785,164.062 300.633,163.961 300.455,163.926 300.277,163.961 300.125,164.062 300.024,164.214 299.989,164.392 300.024,164.57 300.125,164.722 300.277,164.823 300.455,164.858
  dashed: 288.822,164.823 288.974,164.722 289.075,164.57 289.11,164.392 289.075,164.214 288.974,164.062 288.822,163.961 288.644,163.926 288.466,163.961 288.314,164.062 288.213,164.214 288.178,164.392 288.213,164.57 288.314,164.722 288.466,164.823 288.644,164.858
  dashed: 276.757,164.823 276.909,164.722 277.01,164.57 277.045,164.392 277.01,164.214 276.909,164.062 276.757,163.961 276.579,163.926 276.401,163.961 276.249,164.062 276.148,164.214 276.113,164.392 276.148,164.57 276.249,164.722 276.401,164.823 276.579,164.858
  dashed: 276.249,184.127 276.401,184.026 276.502,183.874 276.537,183.696 276.502,183.518 276.401,183.366 276.249,183.265 276.071,183.23 275.893,183.265 275.741,183.366 275.64,183.518 275.605,183.696 275.64,183.874 275.741,184.026 275.893,184.127 276.071,184.162
  dashed: 308.306,174.959 278.306,174.959 278.306,200.959 308.306,200.959
No_PISTE+VIA_FC:
  dashed: 305.259,182.063 305.444,181.94 305.567,181.755 305.611,181.537 305.567,181.319 305.444,181.134 305.259,181.011 305.041,180.967 304.823,181.011 304.638,181.134 304.515,181.319 304.471,181.537 304.515,181.755 304.638,181.94 304.823,182.063 305.041,182.107
  dashed: 301.816,181.555 302.001,181.432 302.124,181.247 302.168,181.029 302.124,180.811 302.001,180.626 301.816,180.503 301.598,180.459 301.38,180.503 301.195,180.626 301.072,180.811 301.028,181.029 301.072,181.247 301.195,181.432 301.38,181.555 301.598,181.599
  dashed: 300.673,164.918 300.858,164.795 300.981,164.61 301.025,164.392 300.981,164.174 300.858,163.989 300.673,163.866 300.455,163.822 300.237,163.866 300.052,163.989 299.929,164.174 299.885,164.392 299.929,164.61 300.052,164.795 300.237,164.918 300.455,164.962
  dashed: 288.862,164.918 289.047,164.795 289.17,164.61 289.214,164.392 289.17,164.174 289.047,163.989 288.862,163.866 288.644,163.822 288.426,163.866 288.241,163.989 288.118,164.174 288.074,164.392 288.118,164.61 288.241,164.795 288.426,164.918 288.644,164.962
  dashed: 276.797,164.918 276.982,164.795 277.105,164.61 277.149,164.392 277.105,164.174 276.982,163.989 276.797,163.866 276.579,163.822 276.361,163.866 276.176,163.989 276.053,164.174 276.009,164.392 276.053,164.61 276.176,164.795 276.361,164.918 276.579,164.962
  dashed: 276.289,184.222 276.474,184.099 276.597,183.914 276.641,183.696 276.597,183.478 276.474,183.293 276.289,183.17 276.071,183.126 275.853,183.17 275.668,183.293 275.545,183.478 275.501,183.696 275.545,183.914 275.668,184.099 275.853,184.222 276.071,184.266
Assem_(MISC):
  dashed: 305.259,182.063 305.444,181.94 305.567,181.755 305.611,181.537 305.567,181.319 305.444,181.134 305.259,181.011 305.041,180.967 304.823,181.011 304.638,181.134 304.515,181.319 304.471,181.537 304.515,181.755 304.638,181.94 304.823,182.063 305.041,182.107
  dashed: 301.816,181.555 302.001,181.432 302.124,181.247 302.168,181.029 302.124,180.811 302.001,180.626 301.816,180.503 301.598,180.459 301.38,180.503 301.195,180.626 301.072,180.811 301.028,181.029 301.072,181.247 301.195,181.432 301.38,181.555 301.598,181.599
  dashed: 300.673,164.918 300.858,164.795 300.981,164.61 301.025,164.392 300.981,164.174 300.858,163.989 300.673,163.866 300.455,163.822 300.237,163.866 300.052,163.989 299.929,164.174 299.885,164.392 299.929,164.61 300.052,164.795 300.237,164.918 300.455,164.962
  dashed: 288.862,164.918 289.047,164.795 289.17,164.61 289.214,164.392 289.17,164.174 289.047,163.989 288.862,163.866 288.644,163.822 288.426,163.866 288.241,163.989 288.118,164.174 288.074,164.392 288.118,164.61 288.241,164.795 288.426,164.918 288.644,164.962
  dashed: 276.797,164.918 276.982,164.795 277.105,164.61 277.149,164.392 277.105,164.174 276.982,163.989 276.797,163.866 276.579,163.822 276.361,163.866 276.176,163.989 276.053,164.174 276.009,164.392 276.053,164.61 276.176,164.795 276.361,164.918 276.579,164.962
  dashed: 276.289,184.222 276.474,184.099 276.597,183.914 276.641,183.696 276.597,183.478 276.474,183.293 276.289,183.17 276.071,183.126 275.853,183.17 275.668,183.293 275.545,183.478 275.501,183.696 275.545,183.914 275.668,184.099 275.853,184.222 276.071,184.266
Drill_ident_1:
  lines w0.1: 215.906,116.959 229.241,116.959
  lines w0.18: 122.134,178.659 126.434,178.759 ; 122.134,185.159 124.734,185.059 ; 122.334,182.859 125.634,182.859 ; 122.434,180.359 125.634,180.359 ; 123.834,176.159 127.334,176.159 ; 123.934,174.459 127.334,174.459 ; 126.234,206.059 132.534,206.059 ; 126.634,185.059 131.434,185.059 ; 126.634,187.159 130.734,187.059 ; 126.734,182.859 130.634,182.959 ; 128.134,179.559 130.834,179.659 ; 132.034,171.959 138.134,172.059 ; 132.134,170.159 138.134,170.159 ; 133.534,185.059 136.434,185.059
  lines w0.6: 122.401,187.062 125.576,187.062 ; 133.513,187.062 138.276,187.062
  text "X" at 133.858,226.259 h4
  text "X" at 124.258,222.059 h4
  text "X" at 129.858,221.959 h4
  text "4" at 129.934,219.059 h1.5
  text "4" at 129.929,214.569 h1.5
  text "4" at 129.929,210.441 h1.5
  text "35u" at 135.534,198.043 h1.5
  text "35u" at 125.834,197.943 h1.5
  text "VERT" at 132.834,193.148 h1.5
  text "X" at 123.458,192.359 h4
  text "BLANCHE" at 131.034,188.948 h1.5
  text "X" at 123.458,188.159 h4
  text "YES" at 129.894,165.781 h1.07
  text "YES" at 129.894,161.971 h1.07
  text "0,3" at 112.854,119.928 h1.8
  text "ATTENTION: Le circuit imprime doit etre UL94V-0. /            (2)Le fabricant doit etre reconnu UL et doit apposer le marquage correspondant." at 215.506,115.359 h2
  text "0,8" at 112.749,114.795 h1.8
  text "The printed circuit board must be UL94V-0 / (2) The manufacturer must be recognized UL and must affix corresponding marking." at 231.606,109.759 h2
  text "0,9" at 112.749,109.715 h1.8
  text "0,95" at 112.749,104.635 h1.8
  text "Toutes les dimensions sonr en millimetres. / All the dimensions are in millimeter." at 232.256,103.559 h2
  text "1,2" at 112.749,99.555 h1.8
  text "(1)Fabrique suivant IPC A610 classe III. / (1)Manufactured according to IPC A610 class III." at 232.256,97.844 h2
  text "1,4" at 112.749,94.475 h1.8
  text "3,5" at 112.749,89.395 h1.8
Drill_ident_1A:
  the board outline again, w0.1
Profiling:
  the board outline again, w0.1
Template:
  lines w0: 251.806,129.459 251.806,200.459 343.306,200.459 343.306,129.459 323.806,129.459 323.806,133.259 311.806,133.259 311.806,129.459 251.806,129.459
format_1:
  text "NOTA: C2 et C27 sont montes en double implantation. /       Two assemblies possible for C2 and C27" at 251.606,114.759 h2
  text "Fabrique suivant IPC A610 classe III. / Manufactured according to IPC A610 class III." at 260.806,106.659 h2
format_1_MIR:
  text "NOTA: T2 a T7 montes en double implantation.  / Plaquer les composants T2 a T7  / lorsqu'ils sont montes en boitier TO220  / afin d'obtenir une coplaneite optimum." at 386.338,206.559 h2
  text "Two assemblies possible from T2 to T7. / To plate the T2 components in T7  / when they are assembled out of caseTO220  / in order to obtain an optimum co planarity." at 387.651,195.259 h2
  text "Toutes les dimensions sonr en millimetres. / All the dimensions are in millimeter." at 387.373,191.359 h2
  text "Fabrique suivant IPC A610 classe III. / Manufactured according to IPC A610 class III." at 385.282,186.109 h2
  text "T2" at 359.825,171.959 h2
  text "A" at 360.37,168.959 h2
  text "T7" at 359.836,165.938 h2
  text "Cote de pliage des TO220" at 374.667,155.053 h2
  text "Dimension folding of TO220" at 372.149,151.953 h2
format_2:
  the board outline again, w0.1
format_2_MIR:
  lines w0.1: 251.306,128.959 343.306,128.959 343.306,200.959 251.306,200.959 251.306,128.959

## Dimensions
251.306,128.959 to 251.306,200.959 on Drill_ident_1
251.306,128.959 to 334.906,192.159 on Drill_ident_1
251.306,128.959 to 334.906,137.959 on Drill_ident_1
251.306,200.959 to 343.806,200.959 on Drill_ident_1
251.306,200.959 to 334.906,137.959 on Drill_ident_1
251.306,200.959 to 260.306,137.959 on Drill_ident_1
359.891,159.959 to 362.431,180.959 on Symbol-B-1
251.306,128.959 to 271.308,144.517 on Symbol-A-1
343.806,200.959 to 323.806,186.744 on Symbol-A-1
343.806,200.959 to 307.016,174.959 on Symbol-A-1
343.806,128.959 to 343.806,200.959 on Symbol-A-1
260.306,137.959 to 334.906,192.159 on Symbol-A-1
251.306,128.959 to 334.906,137.959 on Symbol-A-1
251.306,128.959 to 343.806,128.959 on Symbol-A-1
323.806,186.744 to 343.806,200.959 on Symbol-A-1
343.806,200.959 to 324.806,196.904 on Symbol-A-1
251.306,128.959 to 334.906,192.159 on Symbol-A-1
251.306,200.959 to 307.016,200.959 on Symbol-A-1
251.306,200.959 to 279.076,200.959 on Symbol-A-1
251.306,200.959 to 271.308,167.377 on Symbol-A-1
251.306,200.959 to 260.306,137.959 on Symbol-A-1

## Text inside footprints (layer, text, board x,y; h text height)
C2: Symbol-A-1 "+" at 315.123,176.195 h2.5; comp_equip "+" at 315.123,176.195 h2.5
C4: Symbol-A-1 "+" at 279.405,172.9 h1.23; comp_equip "+" at 279.405,172.9 h1.23
C27: Symbol-A-1 "+" at 315.123,165.4 h2.5; comp_equip "+" at 315.123,165.4 h2.5
C28: Symbol-A-1 "+" at 281.025,180.761 h3.12; Symbol-A "+" at 281.025,180.761 h3.12; comp_equip "+" at 281.025,180.761 h3.12; Serigraphie-FC "+" at 281.025,180.761 h3.12
C29: Symbol-A-1 "+" at 281.025,193.761 h3.12; Symbol-A "+" at 281.025,193.761 h3.12; comp_equip "+" at 281.025,193.761 h3.12; Serigraphie-FC "+" at 281.025,193.761 h3.12
cam5: Symbol-A "Serigraphie face composants" at 280.306,79.563 h1.97; Serigraphie-FC "Serigraphie face composants" at 280.306,79.563 h1.97; Symbol-B "Serigraphie face soudures" at 316.306,79.563 h1.97; Assem_(MISC) "Client : COVIDIEN" at 235.806,74.947 h1.5; Assem_(MISC) "Carte : CDE TURBINE RB0505" at 235.806,79.947 h1.5; Assem_(MISC) "Date : 01.08.12" at 306.306,74.947 h1.5; Assem_(MISC) "Dossier N`: 1008088" at 332.306,74.947 h1.5; Assem_(MISC) "Ind : A" at 349.306,79.952 h1.5; Assem_(MISC) "France Etudes Electroniques" at 194.423,76.491 h1.2; Assem_(MISC) "Fait par : FEE" at 280.306,74.665 h1.5; Assem_(MISC) "Ech : 1/1" at 332.306,79.947 h1.5; Assem_(MISC)_M "Client : COVIDIEN" at 360.806,74.947 h1.5; Assem_(MISC)_M "Carte : CDE TURBINE RB0505" at 360.806,79.947 h1.5; Assem_(MISC)_M "Date : 01.08.12" at 290.306,74.947 h1.5; Assem_(MISC)_M "Dossier N`: 1008088" at 264.306,74.947 h1.5; Assem_(MISC)_M "Ind : A" at 247.306,79.952 h1.5; Assem_(MISC)_M "France Etudes Electroniques" at 201.529,76.491 h1.2; Assem_(MISC)_M "Fait par : FEE" at 316.306,74.665 h1.5; Assem_(MISC)_M "Ech : 1/1" at 264.306,79.947 h1.5; format_2 "Face soudures" at 316.306,79.943 h1.97; format_2 "Face composants" at 280.306,79.572 h1.97; Resist-A "Vernis epargne face composants" at 280.306,79.563 h1.97; MetalMask-A "Pate a braser face composants" at 280.306,79.572 h1.97; Resist-B "Vernis epargne face soudures" at 316.306,79.563 h1.97; MetalMask-B "Pate a braser face soudures" at 316.306,79.943 h1.97; Comp_resist "Vernis epargne face composants" at 280.306,79.563 h1.97; Component "Face composants" at 280.306,79.572 h1.97; Profiling "Detourage" at 280.306,79.563 h1.97; Solder "Face soudures" at 316.306,79.943 h1.97; Solder_resist "Vernis epargne face soudures" at 316.306,79.563 h1.97; interne2 "Face 2" at 280.306,79.943 h1.97; interne3 "Face 3" at 316.306,79.943 h1.97; masque_comp "Pate a braser face composants" at 280.306,79.572 h1.97; masque_sold "Pate a braser face soudures" at 316.306,79.943 h1.97
cam6: Drill_ident_1 "NOTES : UNLESS OTHERWISE SPECIFIED" at 16,260.977 h3; Drill_ident_1 "REV" at 286,257.981 h2.5; Drill_ident_1 "DESCRIPTION" at 320,257.981 h2.5; Drill_ident_1 "DATE" at 375.5,258 h2.5; Drill_ident_1 "SEE AGILE" at 371.5,251.481 h2.5; Drill_ident_1 "SEE AGILE" at 401,251.481 h2.5; Drill_ident_1 "DATE" at 405,258 h2.5; Drill_ident_1 "REVISIONS" at 342,263.977 h3; Drill_ident_1 "PADS DRAWING - ALL CHANGES MUST BE DONE IN PADS SYSTEM" at 310.5,242.977 h3; Drill_ident_1 "COVIDIEN" at 336,47.462 h5; Drill_ident_1 "2101 Faraday Avenue" at 390,50.892 h3; Drill_ident_1 "Carlsbad, CA  92008" at 390,46.677 h3; Drill_ident_1 "TITLE :" at 316,37.981 h2.5; Drill_ident_1 "SIZE" at 316.5,22.481 h2.5; Drill_ident_1 "MODEL" at 328.5,22.481 h2.5; Drill_ident_1 "DWG NO." at 341,22.481 h2.5; Drill_ident_1 "REV" at 414,22.481 h2.5; Drill_ident_1 "B" at 319,17.5 h3; Drill_ident_1 "DWG NO." at 426.019,60.5 h2.5 r90; Drill_ident_1 "REV" at 426.019,120.5 h2.5 r90; Drill_ident_1 "SH" at 426.019,111.5 h2.5 r90; Drill_ident_1 "APPROVALS" at 268,52.477 h3; Drill_ident_1 "DATE" at 301.5,52.5 h3; Drill_ident_1 "SEE AGILE" at 278,19.477 h3; Drill_ident_1 "SEE AGILE" at 278,11.477 h3; Drill_ident_1 "SEE AGILE" at 297.5,19.477 h3; Drill_ident_1 "SEE AGILE" at 297.5,11.477 h3; Drill_ident_1 "DRAWN" at 258,45.981 h2.5; Drill_ident_1 "ENGINEER" at 258,37.981 h2.5; Drill_ident_1 "CHECKED" at 258,29.981 h2.5; Drill_ident_1 "APPROVED" at 258,21.981 h2.5; Drill_ident_1 "RELEASED" at 258,13.981 h2.5; Drill_ident_1 "TOLERANCES ARE :" at 236.5,52.491 h1.2; Drill_ident_1 "ANGLES = +/- 0.5 DEG" at 234,40.488 h1.2; Drill_ident_1 "N/A" at 241.5,30.481 h2.5; Drill_ident_1 "N/A" at 241.5,21.481 h2.5; Drill_ident_1 "N/A" at 234.5,12.481 h2.5; Drill_ident_1 "N/A" at 248,12.481 h2.5; Drill_ident_1 "UNLESS OTHERWISE SPECIFIED" at 231.5,56.491 h1.2; Drill_ident_1 "DIMENSIONS ARE MILLIMETERS" at 231.5,54.491 h1.2; Drill_ident_1 "DO NOT SCALE DRAWING" at 190.5,53.977 h3; Drill_ident_1 "THIRD ANGLE PROJECTION" at 195,16.249 h1.5; Drill_ident_1 "CONFIDENTIALITY STATEMENT" at 133.5,35.485 h2; Drill_ident_1 "Copyright C 2012, Covidien" at 135.5,31.655 h1.7; Drill_ident_1 "The information contained in this document is the" at 124.5,25.982 h1.7; Drill_ident_1 "proprietary and confidential property of Covidien" at 124.5,22.656 h1.7; Drill_ident_1 "Supplied Data, Tooling, Partial or finished materials" at 122.5,19.655 h1.7; Drill_ident_1 "shall not be disclosed to others without" at 129,16.982 h1.7; Drill_ident_1 "the written permission of Covidien" at 131.5,13.663 h1.7; Drill_ident_1 "BLOWER DRIVER CARD" at 340,34.462 h5; Drill_ident_1 "FEE" at 281,43.5 h3; Drill_ident_1 "SEE AGILE" at 278.128,35.361 h3; Drill_ident_1 "SEE AGILE" at 278.128,27.424 h3; Drill_ident_1 "01/08/12" at 298.5,43.469 h3; Drill_ident_1 "SEE AGILE" at 297.496,35.361 h3; Drill_ident_1 "SEE AGILE" at 297.496,27.424 h3; Drill_ident_1A "4" at 59.002,272.875 h6.25; Drill_ident_1A "3" at 162.851,274.216 h6.25; Drill_ident_1A "2" at 266.502,272.875 h6.25; Drill_ident_1A "1" at 369.002,272.875 h6.25; Drill_ident_1A "B" at 426.002,205.875 h6.25; Drill_ident_1A "B" at 2.502,205.875 h6.25; Drill_ident_1A "A" at 2.502,66.875 h6.25; Drill_ident_1A "4" at 59.002,1.875 h6.25; Drill_ident_1A "3" at 161.851,3.217 h6.25; Drill_ident_1A "2" at 266.502,1.875 h6.25; Drill_ident_1A "1" at 369.002,1.875 h6.25; Drill_ident_3 "Template 10093692 Rev A" at 349.5,10.504 h2.5; Drill_ident_3 "SCALE: 1/1" at 315.5,10.981 h2.5; Drill_ident_3 "SHEET 1 OF 1" at 400,10.981 h2.5; Drill_ident_3 "A" at 415.556,17.459 h3; Drill_ident_3 "10096505" at 361.5,16.948 h5; Drill_ident_3 "10096505" at 430.031,75 h3 r90; Drill_ident_3 "A" at 287.556,251.709 h2.5; Drill_ident_3 "RELEASE/CHANGE PER ECO-R213327." at 296.5,251.474 h2.5; Drill_ident_3 "PB540/560" at 325.156,17.428 h3; Drill_ident_3 "Drill Drawing" at 359.956,28.701 h2.5; Drill_ident_3 "1" at 430,112 h3 r90; Drill_ident_3 "A" at 429.806,121.209 h3 r90
cam7: format_1 "COVIDIEN" at 416.806,53.921 h5; format_1 "2101 Faraday Avenue" at 470.806,57.351 h3; format_1 "Carlsbad, CA  92008" at 470.806,53.136 h3; format_1 "TITLE :" at 396.806,44.44 h2.5; format_1 "SIZE" at 397.306,28.94 h2.5; format_1 "MODEL" at 409.306,28.94 h2.5; format_1 "DWG NO." at 421.806,28.94 h2.5; format_1 "APPROVALS" at 348.806,58.936 h3; format_1 "DATE" at 382.306,58.959 h3; format_1 "DRAWN" at 338.806,52.44 h2.5; format_1 "ENGINEER" at 338.806,44.44 h2.5; format_1 "CHECKED" at 338.806,36.44 h2.5; format_1 "APPROVED" at 338.806,28.44 h2.5; format_1 "RELEASED" at 338.806,20.44 h2.5; format_1 "SEE AGILE" at 358.806,25.936 h3; format_1 "SEE AGILE" at 358.806,17.936 h3; format_1 "SEE AGILE" at 378.306,25.936 h3; format_1 "SEE AGILE" at 378.306,17.936 h3; format_1 "Template 10093692 Rev A" at 430.306,16.963 h2.5; format_1 "REV" at 494.806,28.94 h2.5; format_1 "B" at 399.806,23.959 h3; format_1 "UNLESS OTHERWISE SPECIFIED" at 312.306,62.95 h1.2; format_1 "DIMENSIONS ARE MILLIMETERS" at 312.306,60.95 h1.2; format_1 "TOLERANCES ARE :" at 317.306,58.95 h1.2; format_1 "ANGLES = +/- 0.5 DEG" at 314.806,46.947 h1.2; format_1 "N/A" at 322.306,36.94 h2.5; format_1 "N/A" at 322.306,27.94 h2.5; format_1 "N/A" at 315.306,18.94 h2.5; format_1 "N/A" at 328.806,18.94 h2.5; format_1 "DO NOT SCALE DRAWING" at 271.306,60.436 h3; format_1 "THIRD ANGLE PROJECTION" at 275.806,22.708 h1.5; format_1 "CONFIDENTIALITY STATEMENT" at 214.306,41.944 h2; format_1 "Copyright C 2012, Covidien" at 216.306,38.114 h1.7; format_1 "The information contained in this document is the" at 205.306,32.441 h1.7; format_1 "proprietary and confidential property of Covidien" at 205.306,29.115 h1.7; format_1 "Supplied Data, Tooling, Partial or finished materials" at 203.306,26.114 h1.7; format_1 "shall not be disclosed to others without" at 209.806,23.441 h1.7; format_1 "the written permission of Covidien" at 212.306,20.122 h1.7; format_1 "NOTES : UNLESS OTHERWISE SPECIFIED" at 96.806,267.436 h3; format_1 "REVISIONS" at 422.806,270.436 h3; format_1 "REV" at 366.806,264.44 h2.5; format_1 "DESCRIPTION" at 400.806,264.44 h2.5; format_1 "DATE" at 456.306,264.459 h2.5; format_1 "SEE AGILE" at 452.306,257.94 h2.5; format_1 "SEE AGILE" at 481.806,257.94 h2.5; format_1 "DATE" at 485.806,264.459 h2.5; format_1 "DWG NO." at 506.825,66.959 h2.5 r90; format_1 "REV" at 506.825,126.959 h2.5 r90; format_1 "SH" at 506.825,117.959 h2.5 r90; format_1 "PADS DRAWING - ALL CHANGES MUST BE DONE IN PADS SYSTEM" at 391.306,249.436 h3; format_1 "SCALE: 1/1" at 396.306,17.44 h2.5; format_1 "FEE" at 361.806,49.959 h3; format_1 "SEE AGILE" at 358.656,41.936 h3; format_1 "SEE AGILE" at 358.656,33.936 h3; format_1 "01/08/12" at 379.306,49.928 h3; format_1 "SEE AGILE" at 378.156,41.936 h3; format_1 "SEE AGILE" at 378.156,33.936 h3; format_1 "BLOWER DRIVER CARD" at 420.806,40.921 h5; format_1 "SHEET 1 OF 2" at 480.806,17.44 h2.5; format_1 "10096505" at 442.306,23.407 h5; format_1 "A" at 496.056,23.959 h3; format_1 "PB540/560" at 405.656,23.928 h3; format_1 "A" at 368.556,258.209 h2.5; format_1 "1" at 510.806,118.459 h3 r90; format_1 "10096505" at 510.837,81.459 h3 r90; format_1 "A" at 510.806,127.709 h3 r90; format_1 "RELEASE/CHANGE PER ECO-R213327." at 377.306,257.933 h2.5; format_1 "Assembly Drawing FC" at 436.156,35.201 h2.5; format_2 "4" at 139.808,279.334 h6.25; format_2 "3" at 243.657,280.675 h6.25; format_2 "2" at 347.308,279.334 h6.25; format_2 "1" at 449.808,279.334 h6.25; format_2 "B" at 506.808,212.334 h6.25; format_2 "B" at 83.308,212.334 h6.25; format_2 "A" at 83.308,73.334 h6.25; format_2 "4" at 139.808,8.334 h6.25; format_2 "3" at 242.657,9.676 h6.25; format_2 "2" at 347.308,8.334 h6.25; format_2 "1" at 449.808,8.334 h6.25
cam8: format_1 "ROHS - YES" at 260.806,97.948 h1.5; format_1 "MATERIAL: COPPER CLAD LAMINATES ISOLA 370HR (OR EQUIVALENT)," at 260.806,94.653 h1.5; format_1 "RoHS COMPLIANT. U.L. DESIGNATION: ANSI GRADE FR-4, PER IPC 4101." at 260.806,92.798 h1.5; format_1 "ALL EXPOSED CONDUCTIVE SURFACES TO BE IMMERSION NICKEL/GOLD" at 260.806,89.948 h1.5; format_1 "PLATING USING 100-400 MICROINCHES NICKEL AND 3-8 MICROINCHES GOLD." at 260.806,87.943 h1.5; format_1 "FINISH - ENIG" at 260.806,84.948 h1.5; format_1 "ALL FABRICATION PROCESSES ARE TO BE RoHS COMPLIANT." at 260.806,81.943 h1.5; format_1 "MARK BOARD PER J-STD-609A" at 260.806,79.708 h1.5
cam9: format_1_MIR "SIZE" at 196.806,45.94 h2.5; format_1_MIR "MODEL" at 184.806,45.94 h2.5; format_1_MIR "DWG NO." at 172.306,45.94 h2.5; format_1_MIR "Template 10093692 Rev A" at 163.806,33.963 h2.5; format_1_MIR "REV" at 99.306,45.94 h2.5; format_1_MIR "B" at 194.306,40.959 h3; format_1_MIR "REVISIONS" at 171.306,287.436 h3; format_1_MIR "REV" at 227.306,281.44 h2.5; format_1_MIR "DESCRIPTION" at 193.306,281.44 h2.5; format_1_MIR "DATE" at 137.806,281.459 h2.5; format_1_MIR "DATE" at 108.306,281.459 h2.5; format_1_MIR "DWG NO." at 87.287,83.959 h2.5 r270; format_1_MIR "REV" at 87.287,143.959 h2.5 r270; format_1_MIR "SH" at 87.287,134.959 h2.5 r270; format_1_MIR "PADS DRAWING - ALL CHANGES MUST BE DONE IN PADS SYSTEM" at 202.806,266.436 h3; format_1_MIR "CONFIDENTIALITY STATEMENT" at 247.806,58.944 h2; format_1_MIR "Copyright C 2012, Covidien" at 245.806,55.114 h1.7; format_1_MIR "The information contained in this document is the" at 256.806,49.441 h1.7; format_1_MIR "proprietary and confidential property of Covidien" at 256.806,46.115 h1.7; format_1_MIR "Supplied Data, Tooling, Partial or finished materials" at 258.806,43.114 h1.7; format_1_MIR "shall not be disclosed to others without" at 252.306,40.441 h1.7; format_1_MIR "the written permission of Covidien" at 249.806,37.122 h1.7; format_1_MIR "COVIDIEN" at 177.306,53.421 h5; format_1_MIR "2101 Faraday Avenue" at 123.306,56.351 h3; format_1_MIR "Carlsbad, CA  92008" at 123.306,52.136 h3; format_1_MIR "SEE SHEET 1." at 217.806,274.94 h2.5; format_1_MIR "-" at 225.806,275.339 h2.5; format_1_MIR "-" at 135.306,275.339 h2.5; format_1_MIR "-" at 105.306,275.339 h2.5; format_1_MIR "SCALE: 1/1" at 197.806,34.44 h2.5; format_1_MIR "SHEET 2 OF 2" at 113.306,34.44 h2.5; format_1_MIR "10096505" at 151.806,40.407 h5; format_1_MIR "A" at 98.056,40.959 h3; format_1_MIR "PB540/560" at 188.456,40.928 h3; format_1_MIR "2" at 83.306,135.459 h3 r270; format_1_MIR "10096505" at 83.275,98.459 h3 r270; format_1_MIR "A" at 83.306,144.709 h3 r270; format_2_MIR "4" at 454.304,296.334 h6.25; format_2_MIR "3" at 350.455,297.675 h6.25; format_2_MIR "2" at 246.804,296.334 h6.25; format_2_MIR "1" at 144.304,296.334 h6.25; format_2_MIR "B" at 87.304,229.334 h6.25; format_2_MIR "B" at 510.804,229.334 h6.25; format_2_MIR "A" at 510.804,90.334 h6.25; format_2_MIR "4" at 454.304,25.334 h6.25; format_2_MIR "3" at 351.455,26.676 h6.25; format_2_MIR "2" at 246.804,25.334 h6.25; format_2_MIR "1" at 144.304,25.334 h6.25
cam12: Drill_ident_1 "Silkscreen" at 107.081,189.141 h1.07; Drill_ident_1 "Insulation varnish" at 107.081,193.358 h1.12; Drill_ident_1 "SERIGRAPHIE" at 107.081,190.837 h1.07; Drill_ident_1 "VERNIS EPARGNE" at 107.081,195.07 h1.07; Drill_ident_1 "Material thickness" at 107.081,201.839 h1.07; Drill_ident_1 "EPAISSEUR MATIERE" at 107.081,203.535 h1.07; Drill_ident_1 "FR4" at 122.742,206.775 h1.07; Drill_ident_1 "EPAISSEUR CUIVRE" at 107.081,199.148 h1.07; Drill_ident_1 "Copper thickness" at 107.081,197.251 h1.07; Drill_ident_1 "1" at 124.436,223.284 h2.67; Drill_ident_1 "2" at 129.938,223.284 h2.67; Drill_ident_1 "3" at 135.864,223.256 h2.67; Drill_ident_1 "CLASSE IPC" at 107.081,224.545 h1.07; Drill_ident_1 "IPC class" at 107.081,222.849 h1.12; Drill_ident_1 "CLASSE D'ISOLEMENT" at 107.081,220.312 h1.07; Drill_ident_1 "Insulation class" at 107.081,218.616 h1.12; Drill_ident_1 "CLASSE PERCAGE" at 107.081,216.079 h1.07; Drill_ident_1 "Chart class" at 107.081,214.383 h1.12; Drill_ident_1 "NB. DE COUCHES" at 107.081,211.847 h1.07; Drill_ident_1 "Nb. of layers" at 107.081,209.946 h1.07; Drill_ident_1 "Materials" at 107.081,205.918 h1.07; Drill_ident_1 "MATIERE" at 107.081,207.622 h1.07; Drill_ident_1 "NON" at 125.705,228.778 h1.07; Drill_ident_1 "No" at 125.705,227.082 h1.07; Drill_ident_1 "OUI" at 133.748,228.778 h1.07; Drill_ident_1 "Yes" at 133.748,227.082 h1.07; Drill_ident_1 "RoHs" at 107.081,227.929 h1.07; Drill_ident_1 "Standard" at 128.448,208.034 h1.07; Drill_ident_1 "Htg" at 135.886,207.829 h1.07; Drill_ident_1 "Improved" at 128.391,205.717 h1.07; Drill_ident_1 "1.6mm" at 127.394,202.335 h1.8; Drill_ident_1 "EXT          & INT" at 122.742,198.301 h1.07; Drill_ident_1 "COULEUR" at 132.901,195.338 h1.07; Drill_ident_1 "COULEUR" at 132.901,191.105 h1.07; Drill_ident_1 "Electrical test" at 107.081,174.171 h1.07; Drill_ident_1 "TEST ELECTRIQUE" at 107.081,175.757 h1.07; Drill_ident_1 "Date code (2)" at 107.081,161.42 h1.07; Drill_ident_1 "Norm (1)" at 107.081,165.653 h1.07; Drill_ident_1 "DATE CODE (2)" at 107.081,163.114 h1.07; Drill_ident_1 "NORME (1)" at 107.081,167.347 h1.07; Drill_ident_1 "Empilement" at 107.081,169.738 h1.07; Drill_ident_1 "EMPILAGE" at 107.081,171.634 h1.07; Drill_ident_1 "Conn. (Card edge)" at 107.081,178.197 h1.07; Drill_ident_1 "CONNECTEUR A Dgts" at 107.081,179.891 h1.07; Drill_ident_1 "FINITION" at 107.081,185.179 h1.07; Drill_ident_1 "Finish" at 107.081,183.483 h1.07; Drill_ident_1 "NiAu" at 122.742,182.642 h1.07; Drill_ident_1 "Chimi." at 126.975,182.64 h1.07; Drill_ident_1 "Sn" at 122.742,184.756 h1.07; Drill_ident_1 "Chimi." at 126.975,184.756 h1.07; Drill_ident_1 "etame" at 126.975,186.869 h1.07; Drill_ident_1 "SnPb" at 122.742,186.872 h1.07; Drill_ident_1 "Select." at 133.748,186.869 h1.07; Drill_ident_1 "HAL" at 133.748,184.764 h1.07; Drill_ident_1 "NiAu" at 122.742,180.102 h1.07; Drill_ident_1 "Elect." at 122.742,178.404 h1.07; Drill_ident_1 "SnPb" at 128.245,179.253 h1.07; Drill_ident_1 "OUI" at 134.171,175.867 h1.07; Drill_ident_1 "Yes" at 134.171,174.171 h1.07; Drill_ident_1 "SPECIAL" at 132.901,171.634 h1.07; Drill_ident_1 "Special" at 132.901,169.738 h1.07; Drill_ident_1 "LIBRE" at 124.436,171.642 h1.07; Drill_ident_1 "Free" at 124.436,169.938 h1.07; Drill_ident_1 "No" at 124.859,174.171 h1.07; Drill_ident_1 "NON" at 124.859,175.867 h1.07; Drill_ident_1 "2" at 127.822,189.42 h2.67; Drill_ident_1 "2" at 127.822,193.653 h2.67; Drill_ident_1 "1" at 123.589,189.42 h2.67; Drill_ident_1 "1" at 123.589,193.653 h2.67; Drill_ident_1 "OUI" at 129.894,167.051 h1.07; Drill_ident_1 "OUI" at 129.894,163.241 h1.07; Drill_ident_1 "+10% / -10%" at 132.739,201.737 h1.2; Drill_ident_1 "ENIG" at 133.768,182.647 h1.07; Drill_ident_3 "FABRICATION NOTES" at 118.006,232.583 h1.64
cam13: Drill_ident_1 "SYMBOLE" at 125.374,125.116 h1.69; Drill_ident_1 "PERCAGE" at 138.074,125.116 h1.69; Drill_ident_1 "PERCAGE" at 112.039,125.116 h1.69; Drill_ident_1 "SYMBOLE" at 99.974,125.116 h1.69; Drill_ident_1 "+0.15 / -0.10" at 118.464,89.589 h1.23; Drill_ident_1 "+0.10 / -0.05" at 118.389,114.759 h1.23; Drill_ident_1 "+0.10 / -0.10" at 143.789,119.839 h1.23; Drill_ident_1 "+0.10 / -0.05" at 118.464,109.274 h1.23; Drill_ident_1 "+0.10 / -0.05" at 118.464,104.829 h1.23; Drill_ident_1 "+0.10 / -0.05" at 118.464,99.749 h1.23; Drill_ident_1 "+0.10 / -0.05" at 118.464,94.669 h1.23; Drill_ident_1 "+0.10 / -0.10" at 118.402,119.791 h1.23; Drill_ident_3 "Non-plated" at 133.434,129.239 h1.69; Drill_ident_3 "Plated" at 108.97,129.556 h1.69; Drill_ident_3 "TROUS / NON METALLISES" at 132.211,132.332 h1.69; Drill_ident_3 "TROUS  / METALLISES FINIS" at 107.332,132.332 h1.69; Drill_ident_3 "PERCAGES (Hole chart)" at 106.324,137.767 h2.46
ZC2: Symbol-A-1 "+" at 313.633,181.164 h1.87 r90; comp_equip "+" at 313.633,181.164 h1.87 r90
ZC27: Symbol-A-1 "+" at 312.558,170.348 h1.87 r90; comp_equip "+" at 312.558,170.348 h1.87 r90